# EAGLE board PVScontroller_v1_2_with_logo-multiple-with-ICP (EAGLE 7.2.0)
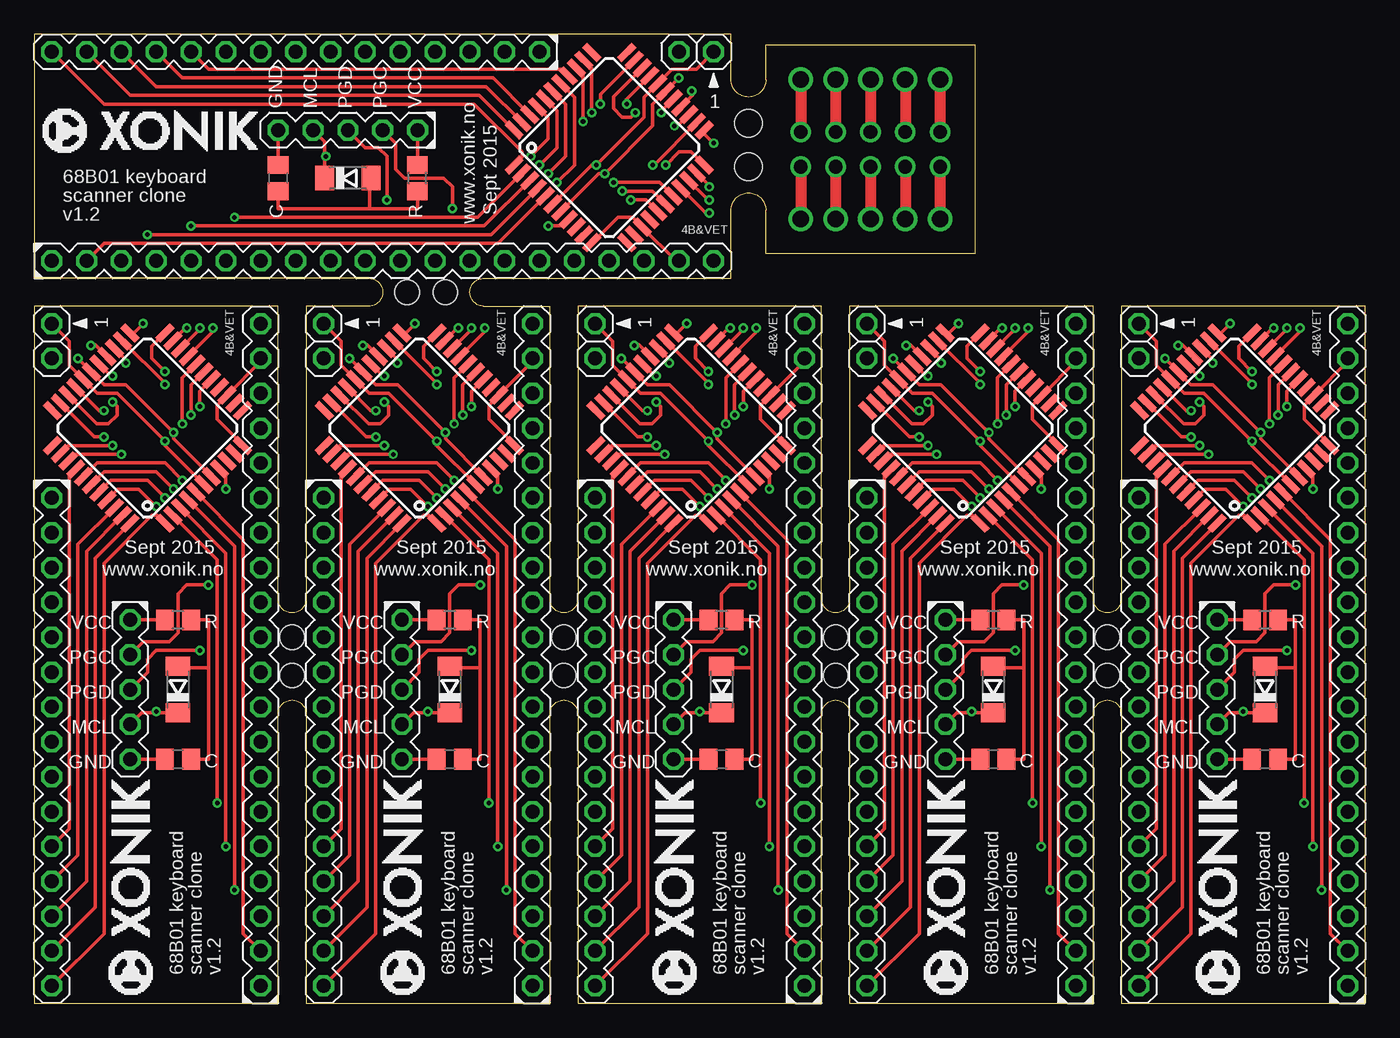
[diagram p0: board, top side]
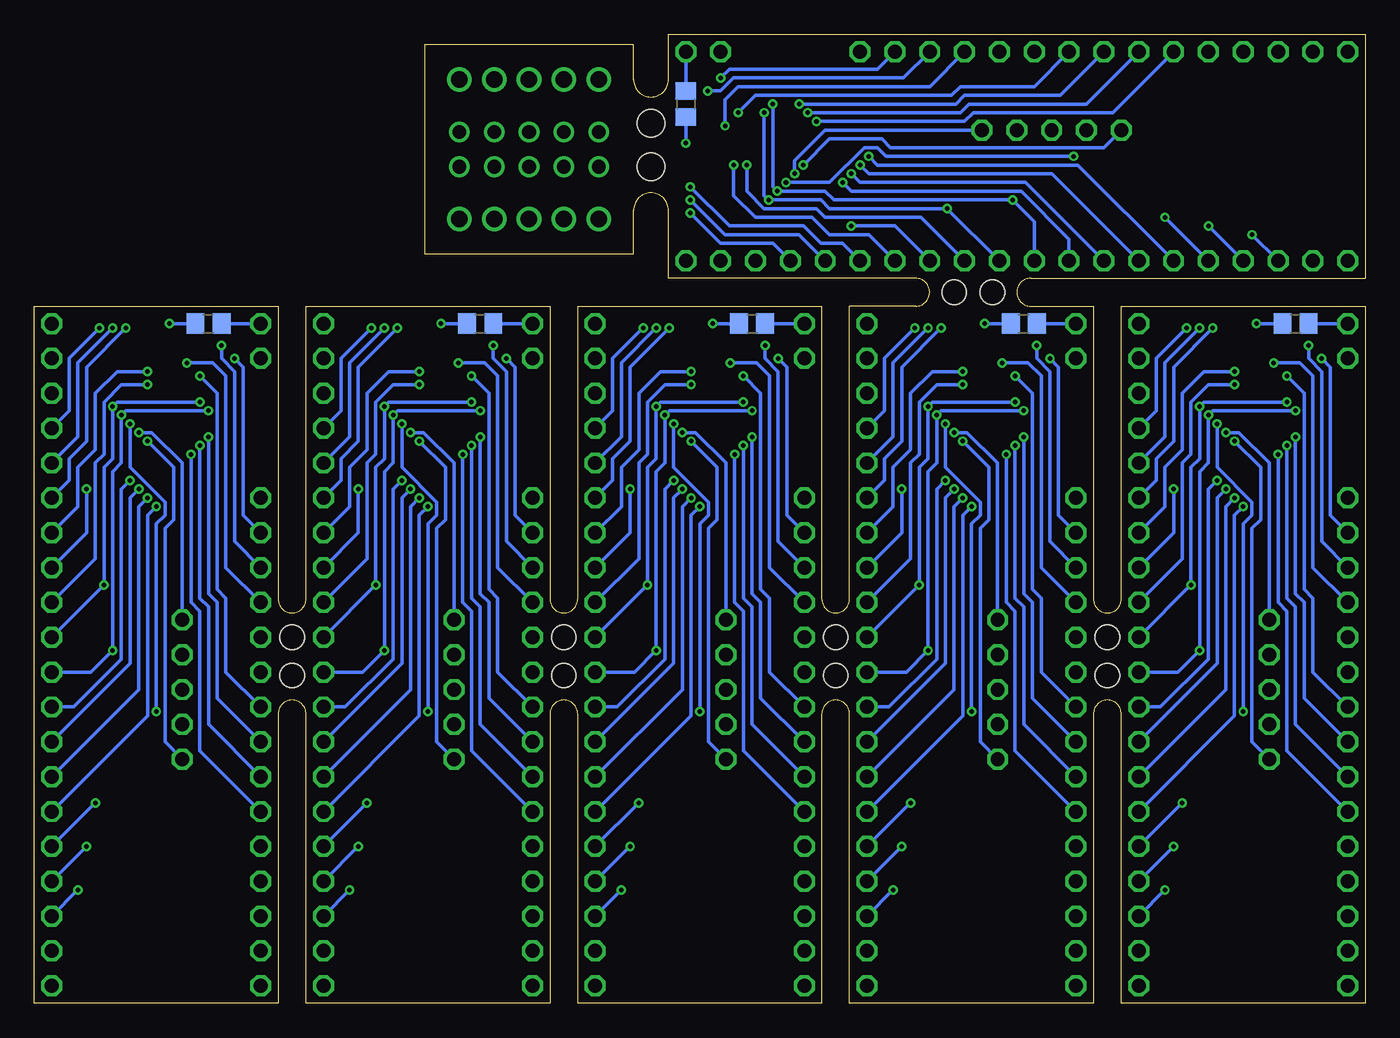
[diagram p1: board, bottom side, seen from below]

Size 97.03 x 70.61 mm. Coordinates in mm from the lower left corner, seen from the top.
Outline: 17.78,0 17.78,21.08 arc-180 19.81,21.08 19.81,0 37.59,0 37.59,21.08 arc-180 39.62,21.08 39.62,0 57.4,0 57.4,21.08 arc-180 59.44,21.08 59.44,0 77.22,0 77.22,21.08 arc-180 79.25,21.08 79.25,0 97.03,0 97.03,50.8 79.25,50.8 79.25,29.46 arc-180 77.22,29.46 77.22,50.8 59.44,50.8 59.44,29.46 arc-180 57.4,29.46 57.4,50.8 39.62,50.8 39.62,29.46 arc-180 37.59,29.46 37.59,50.8 32.77,50.8 arc-180 32.77,52.83 50.8,52.83 50.8,57.78 arc-180 53.34,57.78 53.34,54.61 68.58,54.61 68.58,69.85 53.34,69.85 53.34,67.31 arc-180 50.8,67.31 50.8,70.61 0,70.61 0,52.83 24.38,52.83 arc-180 24.38,50.8 19.81,50.8 19.81,29.46 arc-180 17.78,29.46 17.78,50.8 0,50.8 0,0 17.78,0
Copper layers (1*16): Top 0.0356mm / dielectric 1.5011mm / Bottom 0.0356mm
Design rules "LaenPCBOrder": minimum track width 6mil, minimum drill 13mil, track to track 6mil, track to pad 6mil, pad to pad 6mil, via to via 6mil, smd to smd 6mil, copper to edge 15mil, drill to drill 6mil, minimum pad ring 7mil, minimum via ring 7mil, stop-mask expansion 3mil, vias tented up to drill 0mil, thermal gap 10mil
Holes 1.78 mm at 27.18,51.82 29.97,51.82 18.8,26.67 18.8,23.88 38.61,26.67 38.61,23.88 58.42,26.67 58.42,23.88 78.23,26.67 78.23,23.88
Holes 2.03 mm at 52.07,64.14 52.07,60.96

## Footprints (pad centres in the part's own frame; a part is rotated, then mirrored left to right if it is on the bottom)
C0805 = smd 1.3 x 1.5: 1 -0.95,0; 2 0.95,0
SOD80C = smd 1.4 x 1.8: A 1.7,0; C -1.7,0
TQFP44 = smd 1.5 x 0.5: 1 -5.8,4; 2 -5.8,3.2; 3 -5.8,2.4; 4 -5.8,1.6; 5 -5.8,0.8; 6 -5.8,0; 7 -5.8,-0.8; 8 -5.8,-1.6; 9 -5.8,-2.4; 10 -5.8,-3.2; 11 -5.8,-4; 23 5.8,-4; 24 5.8,-3.2; 25 5.8,-2.4; 26 5.8,-1.6; 27 5.8,-0.8; 28 5.8,0; 29 5.8,0.8; 30 5.8,1.6; 31 5.8,2.4; 32 5.8,3.2; 33 5.8,4 | smd 0.5 x 1.5: 12 -4,-5.8; 13 -3.2,-5.8; 14 -2.4,-5.8; 15 -1.6,-5.8; 16 -0.8,-5.8; 17 0,-5.8; 18 0.8,-5.8; 19 1.6,-5.8; 20 2.4,-5.8; 21 3.2,-5.8; 22 4,-5.8; 34 4,5.8; 35 3.2,5.8; 36 2.4,5.8; 37 1.6,5.8; 38 0.8,5.8; 39 0,5.8; 40 -0.8,5.8; 41 -1.6,5.8; 42 -2.4,5.8; 43 -3.2,5.8; 44 -4,5.8
R0805 = smd 1.3 x 1.5: 1 -0.95,0; 2 0.95,0
MA01-1 = drill 1.016 octagon: 1 0,0
MA20-1 = drill 1.016 octagon: 1 -24.13,0; 2 -21.59,0; 3 -19.05,0; 4 -16.51,0; 5 -13.97,0; 6 -11.43,0; 7 -8.89,0; 8 -6.35,0; 9 -3.81,0; 10 -1.27,0; 11 1.27,0; 12 3.81,0; 13 6.35,0; 14 8.89,0; 15 11.43,0; 16 13.97,0; 17 16.51,0; 18 19.05,0; 19 21.59,0; 20 24.13,0
MA05-1 = drill 1.016 octagon: 1 -5.08,0; 2 -2.54,0; 3 0,0; 4 2.54,0; 5 5.08,0
MA15-1 = drill 1.016 octagon: 1 -17.78,0; 2 -15.24,0; 3 -12.7,0; 4 -10.16,0; 5 -7.62,0; 6 -5.08,0; 7 -2.54,0; 8 0,0; 9 2.54,0; 10 5.08,0; 11 7.62,0; 12 10.16,0; 13 12.7,0; 14 15.24,0; 15 17.78,0

## Placement (x,y rotation side)
C  100nF  [C0805]  10.48,17.78 0 top
C1  100nF  [C0805]  30.29,17.78 0 top
C2  10uF  [C0805]  5.08,49.53 180 bottom
C3  10uF  [C0805]  24.89,49.53 180 bottom
C4  100nF  [C0805]  50.1,17.78 0 top
C5  10uF  [C0805]  44.7,49.53 180 bottom
C6  100nF  [C0805]  69.91,17.78 0 top
C7  10uF  [C0805]  64.52,49.53 180 bottom
C8  100nF  [C0805]  89.73,17.78 0 top
C9  10uF  [C0805]  84.33,49.53 180 bottom
C10  100nF  [C0805]  17.78,60.13 270 top
C11  10uF  [C0805]  49.53,65.53 270 bottom
D1  [SOD80C]  10.48,22.86 90 top
D2  [SOD80C]  30.29,22.86 90 top
D3  [SOD80C]  50.1,22.86 90 top
D4  [SOD80C]  69.91,22.86 90 top
D5  [SOD80C]  89.73,22.86 90 top
D6  [SOD80C]  22.86,60.13 0 top
IC1  PIC18F4455_TQFP  [TQFP44]  8.26,41.91 135 top
IC2  PIC18F4455_TQFP  [TQFP44]  28.07,41.91 135 top
IC3  PIC18F4455_TQFP  [TQFP44]  47.88,41.91 135 top
IC4  PIC18F4455_TQFP  [TQFP44]  67.69,41.91 135 top
IC5  PIC18F4455_TQFP  [TQFP44]  87.5,41.91 135 top
IC6  PIC18F4455_TQFP  [TQFP44]  41.91,62.36 45 top
R  10k  [R0805]  10.48,27.94 180 top
R1  10k  [R0805]  30.29,27.94 180 top
R2  10k  [R0805]  50.1,27.94 180 top
R3  10k  [R0805]  69.91,27.94 180 top
R4  10k  [R0805]  89.73,27.94 180 top
R5  10k  [R0805]  27.94,60.13 90 top
SV1  [MA01-1]  1.27,49.53 90 top
SV2  [MA20-1]  16.51,25.4 90 top
SV3  [MA01-1]  21.08,49.53 90 top
SV4  [MA05-1]  26.8,22.86 270 top
SV5  [MA01-1]  21.08,46.99 90 top
SV6  [MA15-1]  21.08,19.05 270 top
SV7  [MA05-1]  6.99,22.86 270 top
SV8  [MA01-1]  1.27,46.99 90 top
SV9  [MA15-1]  1.27,19.05 270 top
SV10  [MA20-1]  36.32,25.4 90 top
SV11  [MA01-1]  40.89,49.53 90 top
SV12  [MA05-1]  46.61,22.86 270 top
SV13  [MA01-1]  40.89,46.99 90 top
SV14  [MA15-1]  40.89,19.05 270 top
SV15  [MA20-1]  56.13,25.4 90 top
SV16  [MA01-1]  60.71,49.53 90 top
SV17  [MA05-1]  66.42,22.86 270 top
SV18  [MA01-1]  60.71,46.99 90 top
SV19  [MA15-1]  60.71,19.05 270 top
SV20  [MA20-1]  75.95,25.4 90 top
SV21  [MA01-1]  80.52,49.53 90 top
SV22  [MA05-1]  86.23,22.86 270 top
SV23  [MA01-1]  80.52,46.99 90 top
SV24  [MA15-1]  80.52,19.05 270 top
SV25  [MA20-1]  95.76,25.4 90 top
SV26  [MA01-1]  49.53,69.34 0 top
SV27  [MA05-1]  22.86,63.63 180 top
SV28  [MA01-1]  46.99,69.34 0 top
SV29  [MA15-1]  19.05,69.34 180 top
SV30  [MA20-1]  25.4,54.1 0 top

## Library data of the parts
C C1-C11 R R1-R5 = resistor
D1-D6 = diode
IC1-IC6 = microchip; MF: MICROCHIP; MPN: PIC18F4455-I/PT; OC_FARNELL: 9321322; OC_NEWARK: 08J9628
SV1 SV3 SV5 SV8 SV11 SV13 SV16 SV18 SV21 SV23 SV26 SV28 = joakim
SV2 SV4 SV6 SV7 SV9 SV10 SV12 SV14 SV15 SV17 SV19 SV20 SV22 SV24 SV25 SV27 SV29 SV30 = joakim; OC_FARNELL: unknown; OC_NEWARK: unknown

## Nets
+5V: IC1.7 IC1.28 R.2 SV7.1 SV9.2
+5V1: IC2.7 IC2.28 R1.2 SV4.1 SV6.2
+5V2: IC3.7 IC3.28 R2.2 SV12.1 SV14.2
+5V3: IC4.7 IC4.28 R3.2 SV17.1 SV19.2
+5V4: IC5.7 IC5.28 R4.2 SV22.1 SV24.2
+5V5: IC6.7 IC6.28 R5.2 SV27.1 SV29.2
BS0: IC1.19 SV2.17
BS1: IC1.20 SV2.16
BS2: IC1.21 SV2.15
BS3: IC1.22 SV2.14
BS4: IC1.8 SV2.13
BS5: IC1.24 SV2.12
BS6: IC1.16 IC1.31 SV2.11 SV7.2
BS7: IC1.17 IC1.30 SV2.10 SV7.3
BS8: IC2.19 SV10.17
BS9: IC2.20 SV10.16
BS10: IC2.21 SV10.15
BS11: IC2.22 SV10.14
BS12: IC2.8 SV10.13
BS13: IC2.24 SV10.12
BS14: IC2.16 IC2.31 SV4.2 SV10.11
BS15: IC2.17 IC2.30 SV4.3 SV10.10
BS16: IC3.19 SV15.17
BS17: IC3.20 SV15.16
BS18: IC3.21 SV15.15
BS19: IC3.22 SV15.14
BS20: IC3.8 SV15.13
BS21: IC3.24 SV15.12
BS22: IC3.16 IC3.31 SV12.2 SV15.11
BS23: IC3.17 IC3.30 SV12.3 SV15.10
BS24: IC4.19 SV20.17
BS25: IC4.20 SV20.16
BS26: IC4.21 SV20.15
BS27: IC4.22 SV20.14
BS28: IC4.8 SV20.13
BS29: IC4.24 SV20.12
BS30: IC4.16 IC4.31 SV17.2 SV20.11
BS31: IC4.17 IC4.30 SV17.3 SV20.10
BS32: IC5.19 SV25.17
BS33: IC5.20 SV25.16
BS34: IC5.21 SV25.15
BS35: IC5.22 SV25.14
BS36: IC5.8 SV25.13
BS37: IC5.24 SV25.12
BS38: IC5.16 IC5.31 SV22.2 SV25.11
BS39: IC5.17 IC5.30 SV22.3 SV25.10
BS40: IC6.19 SV30.17
BS41: IC6.20 SV30.16
BS42: IC6.21 SV30.15
BS43: IC6.22 SV30.14
BS44: IC6.8 SV30.13
BS45: IC6.24 SV30.12
BS46: IC6.16 IC6.31 SV27.2 SV30.11
BS47: IC6.17 IC6.30 SV27.3 SV30.10
CARRY: IC1.25 SV9.4
CARRY1: IC2.25 SV6.4
CARRY2: IC3.25 SV14.4
CARRY3: IC4.25 SV19.4
CARRY4: IC5.25 SV24.4
CARRY5: IC6.25 SV29.4
CLK: IC1.26 SV9.3
CLK1: IC2.26 SV6.3
CLK2: IC3.26 SV14.3
CLK3: IC4.26 SV19.3
CLK4: IC5.26 SV24.3
CLK5: IC6.26 SV29.3
DB0: IC1.38 SV2.9
DB1: IC1.39 SV2.8
DB2: IC1.40 SV2.7
DB3: IC1.41 SV2.6
DB4: IC1.2 SV2.5
DB5: IC1.3 SV2.4
DB6: IC1.4 SV2.3
DB7: IC1.5 SV2.2
DB8: IC2.38 SV10.9
DB9: IC2.39 SV10.8
DB10: IC2.40 SV10.7
DB11: IC2.41 SV10.6
DB12: IC2.2 SV10.5
DB13: IC2.3 SV10.4
DB14: IC2.4 SV10.3
DB15: IC2.5 SV10.2
DB16: IC3.38 SV15.9
DB17: IC3.39 SV15.8
DB18: IC3.40 SV15.7
DB19: IC3.41 SV15.6
DB20: IC3.2 SV15.5
DB21: IC3.3 SV15.4
DB22: IC3.4 SV15.3
DB23: IC3.5 SV15.2
DB24: IC4.38 SV20.9
DB25: IC4.39 SV20.8
DB26: IC4.40 SV20.7
DB27: IC4.41 SV20.6
DB28: IC4.2 SV20.5
DB29: IC4.3 SV20.4
DB30: IC4.4 SV20.3
DB31: IC4.5 SV20.2
DB32: IC5.38 SV25.9
DB33: IC5.39 SV25.8
DB34: IC5.40 SV25.7
DB35: IC5.41 SV25.6
DB36: IC5.2 SV25.5
DB37: IC5.3 SV25.4
DB38: IC5.4 SV25.3
DB39: IC5.5 SV25.2
DB40: IC6.38 SV30.9
DB41: IC6.39 SV30.8
DB42: IC6.40 SV30.7
DB43: IC6.41 SV30.6
DB44: IC6.2 SV30.5
DB45: IC6.3 SV30.4
DB46: IC6.4 SV30.3
DB47: IC6.5 SV30.2
GND: C2.1 C.1 IC1.6 IC1.29 SV1.1 SV7.5
GND1: C1.1 C3.1 IC2.6 IC2.29 SV3.1 SV4.5
GND2: C4.1 C5.1 IC3.6 IC3.29 SV11.1 SV12.5
GND3: C6.1 C7.1 IC4.6 IC4.29 SV16.1 SV17.5
GND4: C8.1 C9.1 IC5.6 IC5.29 SV21.1 SV22.5
GND5: C10.1 C11.1 IC6.6 IC6.29 SV26.1 SV27.5
KYBD: IC1.11 IC1.14 SV2.19
KYBD1: IC2.11 IC2.14 SV10.19
KYBD2: IC3.11 IC3.14 SV15.19
KYBD3: IC4.11 IC4.14 SV20.19
KYBD4: IC5.11 IC5.14 SV25.19
KYBD5: IC6.11 IC6.14 SV30.19
KYINT: IC1.27 SV9.7
KYINT1: IC2.27 SV6.7
KYINT2: IC3.27 SV14.7
KYINT3: IC4.27 SV19.7
KYINT4: IC5.27 SV24.7
KYINT5: IC6.27 SV29.7
MCLR: D1.C IC1.18 SV7.4
MCLR1: D2.C IC2.18 SV4.4
MCLR2: D3.C IC3.18 SV12.4
MCLR3: D4.C IC4.18 SV17.4
MCLR4: D5.C IC5.18 SV22.4
MCLR5: D6.C IC6.18 SV27.4
N$1: C1.2 D2.A R1.1
N$2: C4.2 D3.A R2.1
N$3: C6.2 D4.A R3.1
N$4: C.2 D1.A R.1
N$5: C8.2 D5.A R4.1
N$6: C10.2 D6.A R5.1
TS0: IC1.32 SV9.8
TS1: IC1.35 SV9.9
TS2: IC1.36 SV9.10
TS3: IC1.37 SV9.11
TS4: IC1.42 SV9.12
TS5: IC1.43 SV9.13
TS6: IC1.44 SV9.14
TS7: IC1.1 SV9.15
TS8: IC2.32 SV6.8
TS9: IC2.35 SV6.9
TS10: IC2.36 SV6.10
TS11: IC2.37 SV6.11
TS12: IC2.42 SV6.12
TS13: IC2.43 SV6.13
TS14: IC2.44 SV6.14
TS15: IC2.1 SV6.15
TS16: IC3.32 SV14.8
TS17: IC3.35 SV14.9
TS18: IC3.36 SV14.10
TS19: IC3.37 SV14.11
TS20: IC3.42 SV14.12
TS21: IC3.43 SV14.13
TS22: IC3.44 SV14.14
TS23: IC3.1 SV14.15
TS24: IC4.32 SV19.8
TS25: IC4.35 SV19.9
TS26: IC4.36 SV19.10
TS27: IC4.37 SV19.11
TS28: IC4.42 SV19.12
TS29: IC4.43 SV19.13
TS30: IC4.44 SV19.14
TS31: IC4.1 SV19.15
TS32: IC5.32 SV24.8
TS33: IC5.35 SV24.9
TS34: IC5.36 SV24.10
TS35: IC5.37 SV24.11
TS36: IC5.42 SV24.12
TS37: IC5.43 SV24.13
TS38: IC5.44 SV24.14
TS39: IC5.1 SV24.15
TS40: IC6.32 SV29.8
TS41: IC6.35 SV29.9
TS42: IC6.36 SV29.10
TS43: IC6.37 SV29.11
TS44: IC6.42 SV29.12
TS45: IC6.43 SV29.13
TS46: IC6.44 SV29.14
TS47: IC6.1 SV29.15
VDD_CORE: C2.2 IC1.23
VDD_CORE1: C3.2 IC2.23
VDD_CORE2: C5.2 IC3.23
VDD_CORE3: C7.2 IC4.23
VDD_CORE4: C9.2 IC5.23
VDD_CORE5: C11.2 IC6.23

## Tracks (layer width: path | path; a pad name or v marks a point on that pad's centre or on a via)
+5V  (via drill 0.33)
  Top 0.254: v3.17,46.99 IC1.28 5.08,45.09 6.67,45.09 v10.16,41.59 10.16,41.14 IC1.7 | R.2 SV7.1
  Bottom 0.254: SV7.1 6.99,39.37 9.21,41.59 v10.16,41.59 | v3.17,46.99 2.54,46.35 2.54,35.56 SV9.2
+5V1  (via drill 0.33)
  Top 0.254: v22.99,46.99 IC2.28 24.89,45.09 26.48,45.09 v29.97,41.59 29.97,41.14 IC2.7 | R1.2 SV4.1
  Bottom 0.254: SV4.1 26.8,39.37 29.02,41.59 v29.97,41.59 | v22.99,46.99 22.35,46.35 22.35,35.56 SV6.2
+5V2  (via drill 0.33)
  Top 0.254: v42.8,46.99 IC3.28 44.7,45.09 46.29,45.09 v49.78,41.59 49.78,41.14 IC3.7 | R2.2 SV12.1
  Bottom 0.254: SV12.1 46.61,39.37 48.83,41.59 v49.78,41.59 | v42.8,46.99 42.16,46.35 42.16,35.56 SV14.2
+5V3  (via drill 0.33)
  Top 0.254: v62.61,46.99 IC4.28 64.52,45.09 66.1,45.09 v69.6,41.59 69.6,41.14 IC4.7 | R3.2 SV17.1
  Bottom 0.254: SV17.1 66.42,39.37 68.64,41.59 v69.6,41.59 | v62.61,46.99 61.98,46.35 61.98,35.56 SV19.2
+5V4  (via drill 0.33)
  Top 0.254: v82.42,46.99 IC5.28 84.33,45.09 85.92,45.09 v89.41,41.59 89.41,41.14 IC5.7 | R4.2 SV22.1
  Bottom 0.254: SV22.1 86.23,39.37 88.46,41.59 v89.41,41.59 | v82.42,46.99 81.79,46.35 81.79,35.56 SV24.2
+5V5  (via drill 0.33)
  Top 0.254: v46.99,67.44 IC6.28 45.09,65.53 45.09,63.94 v41.59,60.45 41.14,60.45 IC6.7 | R5.2 SV27.1
  Bottom 0.254: SV27.1 39.37,63.63 41.59,61.4 v41.59,60.45 | v46.99,67.44 46.35,68.07 35.56,68.07 SV29.2
BS0  (via drill 0.33)
  Top 0.254: v13.02,49.21 12.98,48.9 IC1.19
  Bottom 0.254: SV2.17 15.24,43.18 15.24,46.99 v13.02,49.21
BS1  (via drill 0.33)
  Top 0.254: v12.06,49.21 11.85,48.9 IC1.20
  Bottom 0.254: SV2.16 14.61,41.27 14.61,46.67 v12.06,49.21
BS2  (via drill 0.33)
  Top 0.254: v11.11,49.21 11.03,49.21 IC1.21
  Bottom 0.254: v11.11,49.21 13.97,46.35 13.97,40.96 15.24,39.69 15.24,38.1 SV2.15
BS3  (via drill 0.33)
  Top 0.254: v9.53,46.04 8.57,46.99 8.57,47.88 IC1.22
  Bottom 0.254: SV2.14 14.61,36.2 14.61,39.05 13.34,40.32 13.34,44.45 11.75,46.04 v9.53,46.04
BS4  (via drill 0.33)
  Top 0.254: v13.97,37.47 13.97,38.42 13.49,38.9 IC1.8
  Bottom 0.254: SV2.13 13.97,34.29 v13.97,37.47
BS5  (via drill 0.33)
  Top 0.254: v9.53,45.09 9.53,45.16 IC1.24
  Bottom 0.254: v9.53,45.09 11.43,45.09 12.7,43.81 12.7,40.01 13.34,39.37 13.34,32.38 SV2.12
BS6  (via drill 0.33)
  Top 0.254: v12.7,30.48 11.11,30.48 10.48,29.84 10.48,26.99 9.84,26.35 7.94,26.35 SV7.2 | v5.71,43.81 6.03,43.5 6.03,42.86 5.4,42.23 4.54,42.23 IC1.31 | v12.06,43.5 12.06,44.59 IC1.16
  Bottom 0.254: SV2.11 v12.7,30.48 12.7,39.05 12.06,39.69 v12.06,43.5 11.75,43.81 v5.71,43.81
BS7  (via drill 0.33)
  Top 0.254: v12.06,25.72 8.89,25.72 8.26,25.08 8.26,24.13 SV7.3 | v5.08,43.18 4.72,43.18 IC1.30 | v11.43,42.86 11.43,45.09 IC1.17
  Bottom 0.254: SV2.10 13.65,24.13 v12.06,25.72 12.06,38.73 11.43,39.37 v11.43,42.86 11.11,43.18 v5.08,43.18
BS8  (via drill 0.33)
  Top 0.254: v32.83,49.21 32.79,48.9 IC2.19
  Bottom 0.254: SV10.17 35.05,43.18 35.05,46.99 v32.83,49.21
BS9  (via drill 0.33)
  Top 0.254: v31.88,49.21 31.66,48.9 IC2.20
  Bottom 0.254: SV10.16 34.42,41.27 34.42,46.67 v31.88,49.21
BS10  (via drill 0.33)
  Top 0.254: v30.92,49.21 30.84,49.21 IC2.21
  Bottom 0.254: v30.92,49.21 33.78,46.35 33.78,40.96 35.05,39.69 35.05,38.1 SV10.15
BS11  (via drill 0.33)
  Top 0.254: v29.34,46.04 28.38,46.99 28.38,47.88 IC2.22
  Bottom 0.254: SV10.14 34.42,36.2 34.42,39.05 33.15,40.32 33.15,44.45 31.56,46.04 v29.34,46.04
BS12  (via drill 0.33)
  Top 0.254: v33.78,37.47 33.78,38.42 33.3,38.9 IC2.8
  Bottom 0.254: SV10.13 33.78,34.29 v33.78,37.47
BS13  (via drill 0.33)
  Top 0.254: v29.34,45.09 29.34,45.16 IC2.24
  Bottom 0.254: v29.34,45.09 31.24,45.09 32.51,43.81 32.51,40.01 33.15,39.37 33.15,32.38 SV10.12
BS14  (via drill 0.33)
  Top 0.254: v32.51,30.48 30.92,30.48 30.29,29.84 30.29,26.99 29.65,26.35 27.75,26.35 SV4.2 | v25.53,43.81 25.84,43.5 25.84,42.86 25.21,42.23 24.36,42.23 IC2.31 | v31.88,43.5 31.88,44.59 IC2.16
  Bottom 0.254: SV10.11 v32.51,30.48 32.51,39.05 31.88,39.69 v31.88,43.5 31.56,43.81 v25.53,43.81
BS15  (via drill 0.33)
  Top 0.254: v31.88,25.72 28.7,25.72 28.07,25.08 28.07,24.13 SV4.3 | v24.89,43.18 24.53,43.18 IC2.30 | v31.24,42.86 31.24,45.09 IC2.17
  Bottom 0.254: SV10.10 33.47,24.13 v31.88,25.72 31.88,38.73 31.24,39.37 v31.24,42.86 30.92,43.18 v24.89,43.18
BS16  (via drill 0.33)
  Top 0.254: v52.64,49.21 52.6,48.9 IC3.19
  Bottom 0.254: SV15.17 54.86,43.18 54.86,46.99 v52.64,49.21
BS17  (via drill 0.33)
  Top 0.254: v51.69,49.21 51.47,48.9 IC3.20
  Bottom 0.254: SV15.16 54.23,41.27 54.23,46.67 v51.69,49.21
BS18  (via drill 0.33)
  Top 0.254: v50.74,49.21 50.66,49.21 IC3.21
  Bottom 0.254: v50.74,49.21 53.59,46.35 53.59,40.96 54.86,39.69 54.86,38.1 SV15.15
BS19  (via drill 0.33)
  Top 0.254: v49.15,46.04 48.2,46.99 48.2,47.88 IC3.22
  Bottom 0.254: SV15.14 54.23,36.2 54.23,39.05 52.96,40.32 52.96,44.45 51.37,46.04 v49.15,46.04
BS20  (via drill 0.33)
  Top 0.254: v53.59,37.47 53.59,38.42 53.11,38.9 IC3.8
  Bottom 0.254: SV15.13 53.59,34.29 v53.59,37.47
BS21  (via drill 0.33)
  Top 0.254: v49.15,45.09 49.15,45.16 IC3.24
  Bottom 0.254: v49.15,45.09 51.05,45.09 52.32,43.81 52.32,40.01 52.96,39.37 52.96,32.38 SV15.12
BS22  (via drill 0.33)
  Top 0.254: v52.32,30.48 50.74,30.48 50.1,29.84 50.1,26.99 49.47,26.35 47.56,26.35 SV12.2 | v45.34,43.81 45.66,43.5 45.66,42.86 45.02,42.23 44.17,42.23 IC3.31 | v51.69,43.5 51.69,44.59 IC3.16
  Bottom 0.254: SV15.11 v52.32,30.48 52.32,39.05 51.69,39.69 v51.69,43.5 51.37,43.81 v45.34,43.81
BS23  (via drill 0.33)
  Top 0.254: v51.69,25.72 48.51,25.72 47.88,25.08 47.88,24.13 SV12.3 | v44.7,43.18 44.35,43.18 IC3.30 | v51.05,42.86 51.05,45.09 IC3.17
  Bottom 0.254: SV15.10 53.28,24.13 v51.69,25.72 51.69,38.73 51.05,39.37 v51.05,42.86 50.74,43.18 v44.7,43.18
BS24  (via drill 0.33)
  Top 0.254: v72.45,49.21 72.41,48.9 IC4.19
  Bottom 0.254: SV20.17 74.68,43.18 74.68,46.99 v72.45,49.21
BS25  (via drill 0.33)
  Top 0.254: v71.5,49.21 71.28,48.9 IC4.20
  Bottom 0.254: SV20.16 74.04,41.27 74.04,46.67 v71.5,49.21
BS26  (via drill 0.33)
  Top 0.254: v70.55,49.21 70.47,49.21 IC4.21
  Bottom 0.254: v70.55,49.21 73.41,46.35 73.41,40.96 74.68,39.69 74.68,38.1 SV20.15
BS27  (via drill 0.33)
  Top 0.254: v68.96,46.04 68.01,46.99 68.01,47.88 IC4.22
  Bottom 0.254: SV20.14 74.04,36.2 74.04,39.05 72.77,40.32 72.77,44.45 71.18,46.04 v68.96,46.04
BS28  (via drill 0.33)
  Top 0.254: v73.41,37.47 73.41,38.42 72.92,38.9 IC4.8
  Bottom 0.254: SV20.13 73.41,34.29 v73.41,37.47
BS29  (via drill 0.33)
  Top 0.254: v68.96,45.09 68.96,45.16 IC4.24
  Bottom 0.254: v68.96,45.09 70.87,45.09 72.14,43.81 72.14,40.01 72.77,39.37 72.77,32.38 SV20.12
BS30  (via drill 0.33)
  Top 0.254: v72.14,30.48 70.55,30.48 69.91,29.84 69.91,26.99 69.28,26.35 67.37,26.35 SV17.2 | v65.15,43.81 65.47,43.5 65.47,42.86 64.83,42.23 63.98,42.23 IC4.31 | v71.5,43.5 71.5,44.59 IC4.16
  Bottom 0.254: SV20.11 v72.14,30.48 72.14,39.05 71.5,39.69 v71.5,43.5 71.18,43.81 v65.15,43.81
BS31  (via drill 0.33)
  Top 0.254: v71.5,25.72 68.33,25.72 67.69,25.08 67.69,24.13 SV17.3 | v64.52,43.18 64.16,43.18 IC4.30 | v70.87,42.86 70.87,45.09 IC4.17
  Bottom 0.254: SV20.10 73.09,24.13 v71.5,25.72 71.5,38.73 70.87,39.37 v70.87,42.86 70.55,43.18 v64.52,43.18
BS32  (via drill 0.33)
  Top 0.254: v92.27,49.21 92.22,48.9 IC5.19
  Bottom 0.254: SV25.17 94.49,43.18 94.49,46.99 v92.27,49.21
BS33  (via drill 0.33)
  Top 0.254: v91.31,49.21 91.09,48.9 IC5.20
  Bottom 0.254: SV25.16 93.85,41.27 93.85,46.67 v91.31,49.21
BS34  (via drill 0.33)
  Top 0.254: v90.36,49.21 90.28,49.21 IC5.21
  Bottom 0.254: v90.36,49.21 93.22,46.35 93.22,40.96 94.49,39.69 94.49,38.1 SV25.15
BS35  (via drill 0.33)
  Top 0.254: v88.77,46.04 87.82,46.99 87.82,47.88 IC5.22
  Bottom 0.254: SV25.14 93.85,36.2 93.85,39.05 92.58,40.32 92.58,44.45 91,46.04 v88.77,46.04
BS36  (via drill 0.33)
  Top 0.254: v93.22,37.47 93.22,38.42 92.74,38.9 IC5.8
  Bottom 0.254: SV25.13 93.22,34.29 v93.22,37.47
BS37  (via drill 0.33)
  Top 0.254: v88.77,45.09 88.77,45.16 IC5.24
  Bottom 0.254: v88.77,45.09 90.68,45.09 91.95,43.81 91.95,40.01 92.58,39.37 92.58,32.38 SV25.12
BS38  (via drill 0.33)
  Top 0.254: v91.95,30.48 90.36,30.48 89.72,29.84 89.72,26.99 89.09,26.35 87.19,26.35 SV22.2 | v84.96,43.81 85.28,43.5 85.28,42.86 84.64,42.23 83.79,42.23 IC5.31 | v91.31,43.5 91.31,44.59 IC5.16
  Bottom 0.254: SV25.11 v91.95,30.48 91.95,39.05 91.31,39.69 v91.31,43.5 91,43.81 v84.96,43.81
BS39  (via drill 0.33)
  Top 0.254: v91.31,25.72 88.14,25.72 87.5,25.08 87.5,24.13 SV22.3 | v84.33,43.18 83.97,43.18 IC5.30 | v90.68,42.86 90.68,45.09 IC5.17
  Bottom 0.254: SV25.10 92.9,24.13 v91.31,25.72 91.31,38.73 90.68,39.37 v90.68,42.86 90.36,43.18 v84.33,43.18
BS40  (via drill 0.33)
  Top 0.254: v49.21,57.59 48.9,57.63 IC6.19
  Bottom 0.254: SV30.17 43.18,55.37 46.99,55.37 v49.21,57.59
BS41  (via drill 0.33)
  Top 0.254: v49.21,58.55 48.9,58.77 IC6.20
  Bottom 0.254: SV30.16 41.27,56.01 46.67,56.01 v49.21,58.55
BS42  (via drill 0.33)
  Top 0.254: v49.21,59.5 49.21,59.58 IC6.21
  Bottom 0.254: v49.21,59.5 46.35,56.64 40.96,56.64 39.69,55.37 38.1,55.37 SV30.15
BS43  (via drill 0.33)
  Top 0.254: v46.04,61.09 46.99,62.04 47.88,62.04 IC6.22
  Bottom 0.254: SV30.14 36.2,56.01 39.05,56.01 40.32,57.28 44.45,57.28 46.04,58.86 v46.04,61.09
BS44  (via drill 0.33)
  Top 0.254: v37.47,56.64 38.42,56.64 38.9,57.12 IC6.8
  Bottom 0.254: SV30.13 34.29,56.64 v37.47,56.64
BS45  (via drill 0.33)
  Top 0.254: v45.09,61.09 45.16,61.09 IC6.24
  Bottom 0.254: v45.09,61.09 45.09,59.18 43.81,57.91 40.01,57.91 39.37,57.28 32.38,57.28 SV30.12
BS46  (via drill 0.33)
  Top 0.254: v30.48,57.91 30.48,59.5 29.84,60.13 26.99,60.13 26.35,60.77 26.35,62.67 SV27.2 | v43.81,64.9 43.5,64.58 42.86,64.58 42.23,65.22 42.23,66.07 IC6.31 | v43.5,58.55 44.59,58.55 IC6.16
  Bottom 0.254: SV30.11 v30.48,57.91 39.05,57.91 39.69,58.55 v43.5,58.55 43.81,58.86 v43.81,64.9
BS47  (via drill 0.33)
  Top 0.254: v25.72,58.55 25.72,61.72 25.08,62.36 24.13,62.36 SV27.3 | v43.18,65.53 43.18,65.89 IC6.30 | v42.86,59.18 45.09,59.18 IC6.17
  Bottom 0.254: SV30.10 24.13,56.96 v25.72,58.55 38.73,58.55 39.37,59.18 v42.86,59.18 43.18,59.5 v43.18,65.53
CARRY  (via drill 0.33)
  Top 0.254: v6.67,46.67 6.89,46.67 IC1.25
  Bottom 0.254: SV9.4 3.81,31.75 3.81,45.72 4.76,46.67 v6.67,46.67
CARRY1  (via drill 0.33)
  Top 0.254: v26.48,46.67 26.7,46.67 IC2.25
  Bottom 0.254: SV6.4 23.62,31.75 23.62,45.72 24.57,46.67 v26.48,46.67
CARRY2  (via drill 0.33)
  Top 0.254: v46.29,46.67 46.51,46.67 IC3.25
  Bottom 0.254: SV14.4 43.43,31.75 43.43,45.72 44.39,46.67 v46.29,46.67
CARRY3  (via drill 0.33)
  Top 0.254: v66.1,46.67 66.32,46.67 IC4.25
  Bottom 0.254: SV19.4 63.25,31.75 63.25,45.72 64.2,46.67 v66.1,46.67
CARRY4  (via drill 0.33)
  Top 0.254: v85.92,46.67 86.14,46.67 IC5.25
  Bottom 0.254: SV24.4 83.06,31.75 83.06,45.72 84.01,46.67 v85.92,46.67
CARRY5  (via drill 0.33)
  Top 0.254: v46.67,63.94 46.67,63.73 IC6.25
  Bottom 0.254: SV29.4 31.75,66.8 45.72,66.8 46.67,65.85 v46.67,63.94
CLK  (via drill 0.33)
  Top 0.254: v4.13,47.94 4.45,47.98 IC1.26
  Bottom 0.254: SV9.3 3.17,33.66 3.17,46.04 4.13,46.99 v4.13,47.94
CLK1  (via drill 0.33)
  Top 0.254: v23.94,47.94 24.26,47.98 IC2.26
  Bottom 0.254: SV6.3 22.99,33.66 22.99,46.04 23.94,46.99 v23.94,47.94
CLK2  (via drill 0.33)
  Top 0.254: v43.75,47.94 44.07,47.98 IC3.26
  Bottom 0.254: SV14.3 42.8,33.66 42.8,46.04 43.75,46.99 v43.75,47.94
CLK3  (via drill 0.33)
  Top 0.254: v63.56,47.94 63.88,47.98 IC4.26
  Bottom 0.254: SV19.3 62.61,33.66 62.61,46.04 63.56,46.99 v63.56,47.94
CLK4  (via drill 0.33)
  Top 0.254: v83.38,47.94 83.69,47.98 IC5.26
  Bottom 0.254: SV24.3 82.42,33.66 82.42,46.04 83.38,46.99 v83.38,47.94
CLK5  (via drill 0.33)
  Top 0.254: v47.94,66.48 47.98,66.17 IC6.26
  Bottom 0.254: SV29.3 33.66,67.44 46.04,67.44 46.99,66.48 v47.94,66.48
DB0  (via drill 0.33)
  Top 0.254: v10.79,38.1 9.53,39.37 4.58,39.37 IC1.38
  Bottom 0.254: v10.79,38.1 11.43,37.47 11.43,25.08 14.92,21.59 SV2.9
DB1  (via drill 0.33)
  Top 0.254: v10.16,37.47 8.89,38.73 5.08,38.73 IC1.39
  Bottom 0.254: v10.16,37.47 10.79,36.83 10.79,24.77 SV2.8
DB2  (via drill 0.33)
  Top 0.254: v9.53,36.83 8.26,38.1 5.58,38.1 IC1.40
  Bottom 0.254: v9.53,36.83 10.16,36.2 10.16,22.86 SV2.7
DB3  (via drill 0.33)
  Top 0.254: v8.89,36.2 7.62,37.47 6.07,37.47 IC1.41
  Bottom 0.254: v8.89,36.2 9.53,35.56 9.53,20.95 SV2.6
DB4  (via drill 0.33)
  Top 0.254: v13.34,14.61 13.34,32.3 IC1.2
  Bottom 0.254: SV2.5 v13.34,14.61
DB5  (via drill 0.33)
  Top 0.254: v13.97,11.43 13.97,32.8 IC1.3
  Bottom 0.254: SV2.4 v13.97,11.43
DB6  (via drill 0.33)
  Top 0.254: v14.61,8.26 14.61,33.3 IC1.4
  Bottom 0.254: SV2.3 v14.61,8.26
DB7
  Top 0.254: IC1.5 15.24,33.79 15.24,5.08 SV2.2
DB8  (via drill 0.33)
  Top 0.254: v30.61,38.1 29.34,39.37 24.4,39.37 IC2.38
  Bottom 0.254: v30.61,38.1 31.24,37.47 31.24,25.08 34.73,21.59 SV10.9
DB9  (via drill 0.33)
  Top 0.254: v29.97,37.47 28.7,38.73 24.89,38.73 IC2.39
  Bottom 0.254: v29.97,37.47 30.61,36.83 30.61,24.77 SV10.8
DB10  (via drill 0.33)
  Top 0.254: v29.34,36.83 28.07,38.1 25.39,38.1 IC2.40
  Bottom 0.254: v29.34,36.83 29.97,36.2 29.97,22.86 SV10.7
DB11  (via drill 0.33)
  Top 0.254: v28.7,36.2 27.43,37.47 25.89,37.47 IC2.41
  Bottom 0.254: v28.7,36.2 29.34,35.56 29.34,20.95 SV10.6
DB12  (via drill 0.33)
  Top 0.254: v33.15,14.61 33.15,32.3 IC2.2
  Bottom 0.254: SV10.5 v33.15,14.61
DB13  (via drill 0.33)
  Top 0.254: v33.78,11.43 33.78,32.8 IC2.3
  Bottom 0.254: SV10.4 v33.78,11.43
DB14  (via drill 0.33)
  Top 0.254: v34.42,8.26 34.42,33.3 IC2.4
  Bottom 0.254: SV10.3 v34.42,8.26
DB15
  Top 0.254: IC2.5 35.05,33.79 35.05,5.08 SV10.2
DB16  (via drill 0.33)
  Top 0.254: v50.42,38.1 49.15,39.37 44.21,39.37 IC3.38
  Bottom 0.254: v50.42,38.1 51.05,37.47 51.05,25.08 54.55,21.59 SV15.9
DB17  (via drill 0.33)
  Top 0.254: v49.78,37.47 48.51,38.73 44.7,38.73 IC3.39
  Bottom 0.254: v49.78,37.47 50.42,36.83 50.42,24.77 SV15.8
DB18  (via drill 0.33)
  Top 0.254: v49.15,36.83 47.88,38.1 45.2,38.1 IC3.40
  Bottom 0.254: v49.15,36.83 49.78,36.2 49.78,22.86 SV15.7
DB19  (via drill 0.33)
  Top 0.254: v48.51,36.2 47.24,37.47 45.7,37.47 IC3.41
  Bottom 0.254: v48.51,36.2 49.15,35.56 49.15,20.95 SV15.6
DB20  (via drill 0.33)
  Top 0.254: v52.96,14.61 52.96,32.3 IC3.2
  Bottom 0.254: SV15.5 v52.96,14.61
DB21  (via drill 0.33)
  Top 0.254: v53.59,11.43 53.59,32.8 IC3.3
  Bottom 0.254: SV15.4 v53.59,11.43
DB22  (via drill 0.33)
  Top 0.254: v54.23,8.26 54.23,33.3 IC3.4
  Bottom 0.254: SV15.3 v54.23,8.26
DB23
  Top 0.254: IC3.5 54.86,33.79 54.86,5.08 SV15.2
DB24  (via drill 0.33)
  Top 0.254: v70.23,38.1 68.96,39.37 64.02,39.37 IC4.38
  Bottom 0.254: v70.23,38.1 70.87,37.47 70.87,25.08 74.36,21.59 SV20.9
DB25  (via drill 0.33)
  Top 0.254: v69.6,37.47 68.33,38.73 64.52,38.73 IC4.39
  Bottom 0.254: v69.6,37.47 70.23,36.83 70.23,24.77 SV20.8
DB26  (via drill 0.33)
  Top 0.254: v68.96,36.83 67.69,38.1 65.01,38.1 IC4.40
  Bottom 0.254: v68.96,36.83 69.6,36.2 69.6,22.86 SV20.7
DB27  (via drill 0.33)
  Top 0.254: v68.33,36.2 67.06,37.47 65.51,37.47 IC4.41
  Bottom 0.254: v68.33,36.2 68.96,35.56 68.96,20.95 SV20.6
DB28  (via drill 0.33)
  Top 0.254: v72.77,14.61 72.77,32.3 IC4.2
  Bottom 0.254: SV20.5 v72.77,14.61
DB29  (via drill 0.33)
  Top 0.254: v73.41,11.43 73.41,32.8 IC4.3
  Bottom 0.254: SV20.4 v73.41,11.43
DB30  (via drill 0.33)
  Top 0.254: v74.04,8.26 74.04,33.3 IC4.4
  Bottom 0.254: SV20.3 v74.04,8.26
DB31
  Top 0.254: IC4.5 74.68,33.79 74.68,5.08 SV20.2
DB32  (via drill 0.33)
  Top 0.254: v90.04,38.1 88.77,39.37 83.83,39.37 IC5.38
  Bottom 0.254: v90.04,38.1 90.68,37.47 90.68,25.08 94.17,21.59 SV25.9
DB33  (via drill 0.33)
  Top 0.254: v89.41,37.47 88.14,38.73 84.33,38.73 IC5.39
  Bottom 0.254: v89.41,37.47 90.04,36.83 90.04,24.77 SV25.8
DB34  (via drill 0.33)
  Top 0.254: v88.77,36.83 87.5,38.1 84.82,38.1 IC5.40
  Bottom 0.254: v88.77,36.83 89.41,36.2 89.41,22.86 SV25.7
DB35  (via drill 0.33)
  Top 0.254: v88.14,36.2 86.87,37.47 85.32,37.47 IC5.41
  Bottom 0.254: v88.14,36.2 88.77,35.56 88.77,20.95 SV25.6
DB36  (via drill 0.33)
  Top 0.254: v92.58,14.61 92.58,32.3 IC5.2
  Bottom 0.254: SV25.5 v92.58,14.61
DB37  (via drill 0.33)
  Top 0.254: v93.22,11.43 93.22,32.8 IC5.3
  Bottom 0.254: SV25.4 v93.22,11.43
DB38  (via drill 0.33)
  Top 0.254: v93.85,8.26 93.85,33.3 IC5.4
  Bottom 0.254: SV25.3 v93.85,8.26
DB39
  Top 0.254: IC5.5 94.49,33.79 94.49,5.08 SV25.2
DB40  (via drill 0.33)
  Top 0.254: v38.1,59.82 39.37,61.09 39.37,66.03 IC6.38
  Bottom 0.254: v38.1,59.82 37.47,59.18 25.08,59.18 21.59,55.69 SV30.9
DB41  (via drill 0.33)
  Top 0.254: v37.47,60.45 38.73,61.72 38.73,65.53 IC6.39
  Bottom 0.254: v37.47,60.45 36.83,59.82 24.77,59.82 SV30.8
DB42  (via drill 0.33)
  Top 0.254: v36.83,61.09 38.1,62.36 38.1,65.04 IC6.40
  Bottom 0.254: v36.83,61.09 36.2,60.45 22.86,60.45 SV30.7
DB43  (via drill 0.33)
  Top 0.254: v36.2,61.72 37.47,62.99 37.47,64.54 IC6.41
  Bottom 0.254: v36.2,61.72 35.56,61.09 20.95,61.09 SV30.6
DB44  (via drill 0.33)
  Top 0.254: v14.61,57.28 32.3,57.28 IC6.2
  Bottom 0.254: SV30.5 v14.61,57.28
DB45  (via drill 0.33)
  Top 0.254: v11.43,56.64 32.8,56.64 IC6.3
  Bottom 0.254: SV30.4 v11.43,56.64
DB46  (via drill 0.33)
  Top 0.254: v8.26,56.01 33.3,56.01 IC6.4
  Bottom 0.254: SV30.3 v8.26,56.01
DB47
  Top 0.254: IC6.5 33.79,55.37 5.08,55.37 SV30.2
GND  (via drill 0.33)
  Top 0.254: SV1.1 2.54,48.26 2.54,46.49 IC1.29 4.58,44.45 6.03,44.45 v9.53,40.96 9.53,40.64 IC1.6 | C.1 SV7.5
  Bottom 0.254: v9.53,40.96 7.62,39.05 7.62,35.24 8.26,34.61 8.26,19.05 SV7.5 | C2.1 SV1.1
GND1  (via drill 0.33)
  Top 0.254: SV3.1 22.35,48.26 22.35,46.49 IC2.29 24.4,44.45 25.84,44.45 v29.34,40.96 29.34,40.64 IC2.6 | C1.1 SV4.5
  Bottom 0.254: v29.34,40.96 27.43,39.05 27.43,35.24 28.07,34.61 28.07,19.05 SV4.5 | C3.1 SV3.1
GND2  (via drill 0.33)
  Top 0.254: SV11.1 42.16,48.26 42.16,46.49 IC3.29 44.21,44.45 45.66,44.45 v49.15,40.96 49.15,40.64 IC3.6 | C4.1 SV12.5
  Bottom 0.254: v49.15,40.96 47.24,39.05 47.24,35.24 47.88,34.61 47.88,19.05 SV12.5 | C5.1 SV11.1
GND3  (via drill 0.33)
  Top 0.254: SV16.1 61.98,48.26 61.98,46.49 IC4.29 64.02,44.45 65.47,44.45 v68.96,40.96 68.96,40.64 IC4.6 | C6.1 SV17.5
  Bottom 0.254: v68.96,40.96 67.06,39.05 67.06,35.24 67.69,34.61 67.69,19.05 SV17.5 | C7.1 SV16.1
GND4  (via drill 0.33)
  Top 0.254: SV21.1 81.79,48.26 81.79,46.49 IC5.29 83.83,44.45 85.28,44.45 v88.77,40.96 88.77,40.64 IC5.6 | C8.1 SV22.5
  Bottom 0.254: v88.77,40.96 86.87,39.05 86.87,35.24 87.5,34.61 87.5,19.05 SV22.5 | C9.1 SV21.1
GND5  (via drill 0.33)
  Top 0.254: SV26.1 48.26,68.07 46.49,68.07 IC6.29 44.45,66.03 44.45,64.58 v40.96,61.09 40.64,61.09 IC6.6 | C10.1 SV27.5
  Bottom 0.254: v40.96,61.09 39.05,62.99 35.24,62.99 34.61,62.36 19.05,62.36 SV27.5 | C11.1 SV26.1
KYBD
  Top 0.254: IC1.11 15.19,40.7 13.34,42.55 13.34,43.6 IC1.14 16.51,46.77 SV2.19
KYBD1
  Top 0.254: IC2.11 35,40.7 33.15,42.55 33.15,43.6 IC2.14 36.32,46.77 SV10.19
KYBD2
  Top 0.254: IC3.11 54.81,40.7 52.96,42.55 52.96,43.6 IC3.14 56.13,46.77 SV15.19
KYBD3
  Top 0.254: IC4.11 74.62,40.7 72.77,42.55 72.77,43.6 IC4.14 75.95,46.77 SV20.19
KYBD4
  Top 0.254: IC5.11 94.43,40.7 92.58,42.55 92.58,43.6 IC5.14 95.76,46.77 SV25.19
KYBD5
  Top 0.254: IC6.11 40.7,55.43 42.55,57.28 43.6,57.28 IC6.14 46.77,54.1 SV30.19
KYINT  (via drill 0.33)
  Top 0.254: v5.71,45.72 5.58,45.72 IC1.27
  Bottom 0.254: SV9.7 3.81,24.13 3.81,29.53 4.45,30.16 4.45,44.45 v5.71,45.72
KYINT1  (via drill 0.33)
  Top 0.254: v25.53,45.72 25.39,45.72 IC2.27
  Bottom 0.254: SV6.7 23.62,24.13 23.62,29.53 24.26,30.16 24.26,44.45 v25.53,45.72
KYINT2  (via drill 0.33)
  Top 0.254: v45.34,45.72 45.2,45.72 IC3.27
  Bottom 0.254: SV14.7 43.43,24.13 43.43,29.53 44.07,30.16 44.07,44.45 v45.34,45.72
KYINT3  (via drill 0.33)
  Top 0.254: v65.15,45.72 65.01,45.72 IC4.27
  Bottom 0.254: SV19.7 63.25,24.13 63.25,29.53 63.88,30.16 63.88,44.45 v65.15,45.72
KYINT4  (via drill 0.33)
  Top 0.254: v84.96,45.72 84.82,45.72 IC5.27
  Bottom 0.254: SV24.7 83.06,24.13 83.06,29.53 83.69,30.16 83.69,44.45 v84.96,45.72
KYINT5  (via drill 0.33)
  Top 0.254: v45.72,64.9 45.72,65.04 IC6.27
  Bottom 0.254: SV29.7 24.13,66.8 29.53,66.8 30.16,66.17 44.45,66.17 v45.72,64.9
MCLR  (via drill 0.33)
  Top 0.254: 11.25,46.04 IC1.18 10.79,45.58 v10.79,42.23 | D1.C 8.89,21.16 | 8.89,21.16 7.83,21.16 SV7.4 | v8.89,21.27 8.89,21.16
  Bottom 0.254: v8.89,21.27 8.89,34.92 8.26,35.56 8.26,36.51 10.79,39.05 v10.79,42.23
MCLR1  (via drill 0.33)
  Top 0.254: 31.06,46.04 IC2.18 30.61,45.58 v30.61,42.23 | D2.C 28.7,21.16 | 28.7,21.16 27.64,21.16 SV4.4 | v28.7,21.27 28.7,21.16
  Bottom 0.254: v28.7,21.27 28.7,34.92 28.07,35.56 28.07,36.51 30.61,39.05 v30.61,42.23
MCLR2  (via drill 0.33)
  Top 0.254: 50.88,46.04 IC3.18 50.42,45.58 v50.42,42.23 | D3.C 48.51,21.16 | 48.51,21.16 47.45,21.16 SV12.4 | v48.51,21.27 48.51,21.16
  Bottom 0.254: v48.51,21.27 48.51,34.92 47.88,35.56 47.88,36.51 50.42,39.05 v50.42,42.23
MCLR3  (via drill 0.33)
  Top 0.254: 70.69,46.04 IC4.18 70.23,45.58 v70.23,42.23 | D4.C 68.33,21.16 | 68.33,21.16 67.26,21.16 SV17.4 | v68.33,21.27 68.33,21.16
  Bottom 0.254: v68.33,21.27 68.33,34.92 67.69,35.56 67.69,36.51 70.23,39.05 v70.23,42.23
MCLR4  (via drill 0.33)
  Top 0.254: 90.5,46.04 IC5.18 90.04,45.58 v90.04,42.23 | D5.C 88.14,21.16 | 88.14,21.16 87.07,21.16 SV22.4 | v88.14,21.27 88.14,21.16
  Bottom 0.254: v88.14,21.27 88.14,34.92 87.5,35.56 87.5,36.51 90.04,39.05 v90.04,42.23
MCLR5  (via drill 0.33)
  Top 0.254: 46.04,59.36 IC6.18 45.58,59.82 v42.23,59.82 | D6.C 21.16,61.72 | 21.16,61.72 21.16,62.79 SV27.4 | v21.27,61.72 21.16,61.72
  Bottom 0.254: v21.27,61.72 34.92,61.72 35.56,62.36 36.51,62.36 39.05,59.82 v42.23,59.82
N$1
  Top 0.254: C1.2 32.51,17.78 32.51,24.45 | 32.51,24.45 32.51,27.94 R1.1 | D2.A 30.61,24.45 32.51,24.45
N$2
  Top 0.254: C4.2 52.32,17.78 52.32,24.45 | 52.32,24.45 52.32,27.94 R2.1 | D3.A 50.42,24.45 52.32,24.45
N$3
  Top 0.254: C6.2 72.14,17.78 72.14,24.45 | 72.14,24.45 72.14,27.94 R3.1 | D4.A 70.23,24.45 72.14,24.45
N$4
  Top 0.254: C.2 12.7,17.78 12.7,24.45 | 12.7,24.45 12.7,27.94 R.1 | D1.A 10.79,24.45 12.7,24.45
N$5
  Top 0.254: C8.2 91.95,17.78 91.95,24.45 | 91.95,24.45 91.95,27.94 R4.1 | D5.A 90.04,24.45 91.95,24.45
N$6
  Top 0.254: C10.2 17.78,57.91 24.45,57.91 | 24.45,57.91 27.94,57.91 R5.1 | D6.A 24.45,59.82 24.45,57.91
S$6  (via drill 1, 1.2)
  Top 0.813: v55.88,67.31 v55.88,63.5 | v58.42,67.31 v58.42,63.5 | v60.96,67.31 v60.96,63.5 | v63.5,67.31 v63.5,63.5 | v66.04,67.31 v66.04,63.5 | v55.88,60.96 v55.88,57.15 | v58.42,60.96 v58.42,57.15 | v60.96,60.96 v60.96,57.15 | v63.5,60.96 v63.5,57.15 | v66.04,60.96 v66.04,57.15
TS0  (via drill 0.33)
  Top 0.254: v5.08,41.27 4.37,41.27 IC1.32
  Bottom 0.254: v5.08,41.27 5.08,29.84 4.45,29.21 4.45,22.23 SV9.8
TS1  (via drill 0.33)
  Top 0.254: v5.71,40.64 2.46,40.64 IC1.35
  Bottom 0.254: v5.71,40.64 5.71,29.53 5.08,28.89 5.08,20.32 SV9.9
TS2  (via drill 0.33)
  Top 0.254: v6.35,40.01 2.96,40.01 IC1.36
  Bottom 0.254: v6.35,40.01 6.35,29.21 5.71,28.57 5.71,18.41 SV9.10
TS3
  Top 0.254: IC1.37 3.02,38.9 2.54,38.42 2.54,12.7 SV9.11
TS4
  Top 0.254: IC1.42 3.17,33.44 3.17,10.79 SV9.12
TS5
  Top 0.254: IC1.43 3.81,32.94 3.81,8.89 SV9.13
TS6
  Top 0.254: IC1.44 4.45,32.44 4.45,6.99 SV9.14
TS7
  Top 0.254: IC1.1 8.95,35.56 8.57,35.56 5.08,32.07 5.08,5.08 SV9.15
  Top 0.305: 9.47,34.98 IC1.1
TS8  (via drill 0.33)
  Top 0.254: v24.89,41.27 24.18,41.27 IC2.32
  Bottom 0.254: v24.89,41.27 24.89,29.84 24.26,29.21 24.26,22.23 SV6.8
TS9  (via drill 0.33)
  Top 0.254: v25.53,40.64 22.27,40.64 IC2.35
  Bottom 0.254: v25.53,40.64 25.53,29.53 24.89,28.89 24.89,20.32 SV6.9
TS10  (via drill 0.33)
  Top 0.254: v26.16,40.01 22.77,40.01 IC2.36
  Bottom 0.254: v26.16,40.01 26.16,29.21 25.53,28.57 25.53,18.41 SV6.10
TS11
  Top 0.254: IC2.37 22.83,38.9 22.35,38.42 22.35,12.7 SV6.11
TS12
  Top 0.254: IC2.42 22.99,33.44 22.99,10.79 SV6.12
TS13
  Top 0.254: IC2.43 23.62,32.94 23.62,8.89 SV6.13
TS14
  Top 0.254: IC2.44 24.26,32.44 24.26,6.99 SV6.14
TS15
  Top 0.254: IC2.1 28.76,35.56 28.38,35.56 24.89,32.07 24.89,5.08 SV6.15
  Top 0.305: 29.28,34.98 IC2.1
TS16  (via drill 0.33)
  Top 0.254: v44.7,41.27 43.99,41.27 IC3.32
  Bottom 0.254: v44.7,41.27 44.7,29.84 44.07,29.21 44.07,22.23 SV14.8
TS17  (via drill 0.33)
  Top 0.254: v45.34,40.64 42.08,40.64 IC3.35
  Bottom 0.254: v45.34,40.64 45.34,29.53 44.7,28.89 44.7,20.32 SV14.9
TS18  (via drill 0.33)
  Top 0.254: v45.97,40.01 42.58,40.01 IC3.36
  Bottom 0.254: v45.97,40.01 45.97,29.21 45.34,28.57 45.34,18.41 SV14.10
TS19
  Top 0.254: IC3.37 42.65,38.9 42.16,38.42 42.16,12.7 SV14.11
TS20
  Top 0.254: IC3.42 42.8,33.44 42.8,10.79 SV14.12
TS21
  Top 0.254: IC3.43 43.43,32.94 43.43,8.89 SV14.13
TS22
  Top 0.254: IC3.44 44.07,32.44 44.07,6.99 SV14.14
TS23
  Top 0.254: IC3.1 48.57,35.56 48.2,35.56 44.7,32.07 44.7,5.08 SV14.15
  Top 0.305: 49.09,34.98 IC3.1
TS24  (via drill 0.33)
  Top 0.254: v64.52,41.27 63.8,41.27 IC4.32
  Bottom 0.254: v64.52,41.27 64.52,29.84 63.88,29.21 63.88,22.23 SV19.8
TS25  (via drill 0.33)
  Top 0.254: v65.15,40.64 61.9,40.64 IC4.35
  Bottom 0.254: v65.15,40.64 65.15,29.53 64.52,28.89 64.52,20.32 SV19.9
TS26  (via drill 0.33)
  Top 0.254: v65.79,40.01 62.39,40.01 IC4.36
  Bottom 0.254: v65.79,40.01 65.79,29.21 65.15,28.57 65.15,18.41 SV19.10
TS27
  Top 0.254: IC4.37 62.46,38.9 61.98,38.42 61.98,12.7 SV19.11
TS28
  Top 0.254: IC4.42 62.61,33.44 62.61,10.79 SV19.12
TS29
  Top 0.254: IC4.43 63.25,32.94 63.25,8.89 SV19.13
TS30
  Top 0.254: IC4.44 63.88,32.44 63.88,6.99 SV19.14
TS31
  Top 0.254: IC4.1 68.38,35.56 68.01,35.56 64.52,32.07 64.52,5.08 SV19.15
  Top 0.305: 68.91,34.98 IC4.1
TS32  (via drill 0.33)
  Top 0.254: v84.33,41.27 83.61,41.27 IC5.32
  Bottom 0.254: v84.33,41.27 84.33,29.84 83.69,29.21 83.69,22.23 SV24.8
TS33  (via drill 0.33)
  Top 0.254: v84.96,40.64 81.71,40.64 IC5.35
  Bottom 0.254: v84.96,40.64 84.96,29.53 84.33,28.89 84.33,20.32 SV24.9
TS34  (via drill 0.33)
  Top 0.254: v85.6,40.01 82.2,40.01 IC5.36
  Bottom 0.254: v85.6,40.01 85.6,29.21 84.96,28.57 84.96,18.41 SV24.10
TS35
  Top 0.254: IC5.37 82.27,38.9 81.79,38.42 81.79,12.7 SV24.11
TS36
  Top 0.254: IC5.42 82.42,33.44 82.42,10.79 SV24.12
TS37
  Top 0.254: IC5.43 83.06,32.94 83.06,8.89 SV24.13
TS38
  Top 0.254: IC5.44 83.69,32.44 83.69,6.99 SV24.14
TS39
  Top 0.254: IC5.1 88.2,35.56 87.82,35.56 84.33,32.07 84.33,5.08 SV24.15
  Top 0.305: 88.72,34.98 IC5.1
TS40  (via drill 0.33)
  Top 0.254: v41.27,65.53 41.27,66.25 IC6.32
  Bottom 0.254: v41.27,65.53 29.84,65.53 29.21,66.17 22.23,66.17 SV29.8
TS41  (via drill 0.33)
  Top 0.254: v40.64,64.9 40.64,68.15 IC6.35
  Bottom 0.254: v40.64,64.9 29.53,64.9 28.89,65.53 20.32,65.53 SV29.9
TS42  (via drill 0.33)
  Top 0.254: v40.01,64.26 40.01,67.66 IC6.36
  Bottom 0.254: v40.01,64.26 29.21,64.26 28.57,64.9 18.41,64.9 SV29.10
TS43
  Top 0.254: IC6.37 38.9,67.59 38.42,68.07 12.7,68.07 SV29.11
TS44
  Top 0.254: IC6.42 33.44,67.44 10.79,67.44 SV29.12
TS45
  Top 0.254: IC6.43 32.94,66.8 8.89,66.8 SV29.13
TS46
  Top 0.254: IC6.44 32.44,66.17 6.99,66.17 SV29.14
TS47
  Top 0.254: IC6.1 35.56,61.66 35.56,62.04 32.07,65.53 5.08,65.53 SV29.15
  Top 0.305: 34.98,61.14 IC6.1
VDD_CORE  (via drill 0.33)
  Top 0.254: IC1.23 7.25,48.84 v7.94,49.53
  Bottom 0.254: v7.94,49.53 C2.2
VDD_CORE1  (via drill 0.33)
  Top 0.254: IC2.23 27.06,48.84 v27.75,49.53
  Bottom 0.254: v27.75,49.53 C3.2
VDD_CORE2  (via drill 0.33)
  Top 0.254: IC3.23 46.87,48.84 v47.56,49.53
  Bottom 0.254: v47.56,49.53 C5.2
VDD_CORE3  (via drill 0.33)
  Top 0.254: IC4.23 66.68,48.84 v67.37,49.53
  Bottom 0.254: v67.37,49.53 C7.2
VDD_CORE4  (via drill 0.33)
  Top 0.254: IC5.23 86.5,48.84 v87.19,49.53
  Bottom 0.254: v87.19,49.53 C9.2
VDD_CORE5  (via drill 0.33)
  Top 0.254: IC6.23 48.84,63.37 v49.53,62.67
  Bottom 0.254: v49.53,62.67 C11.2

## Text on the board
tPlace: GND | MCL | PGD | PGC | VCC | 1 | 68B01 keyboard | scanner clone | v1.2 | www.xonik.no | Sept 2015 | 4B&VET | 1 | 1 | 1 | 1 | 1 | 4B&VET | 4B&VET | 4B&VET | 4B&VET | 4B&VET | Sept 2015 | Sept 2015 | Sept 2015 | Sept 2015 | Sept 2015 | www.xonik.no | www.xonik.no | www.xonik.no | www.xonik.no | www.xonik.no | VCC | VCC | VCC | VCC | VCC | PGC | PGC | PGC | PGC | PGC | PGD | PGD | PGD | PGD | PGD | MCL | MCL | MCL | MCL | MCL | GND | GND | GND | GND | GND | 68B01 keyboard | scanner clone | v1.2 | 68B01 keyboard | scanner clone | v1.2 | 68B01 keyboard | scanner clone | v1.2 | 68B01 keyboard | scanner clone | v1.2 | 68B01 keyboard | scanner clone | v1.2
tNames: C | R | R | R | R | R | R | C | C | C | C | C